# Altium PCB RX.PcbDoc (part 2 of 2)
Units mil, origin at the board's own origin, x right, y up, seen from the top; angles counter-clockwise.
Board outline 2899 x 930 mil, 4 copper layers (Top Layer, Int1 (GND), Int2 (PWR), Bottom Layer), stack 53.912 mil thick; 154 components, 91 nets, 472 pads, 94 vias.
Unrouted connection lines stored in the file: 29.
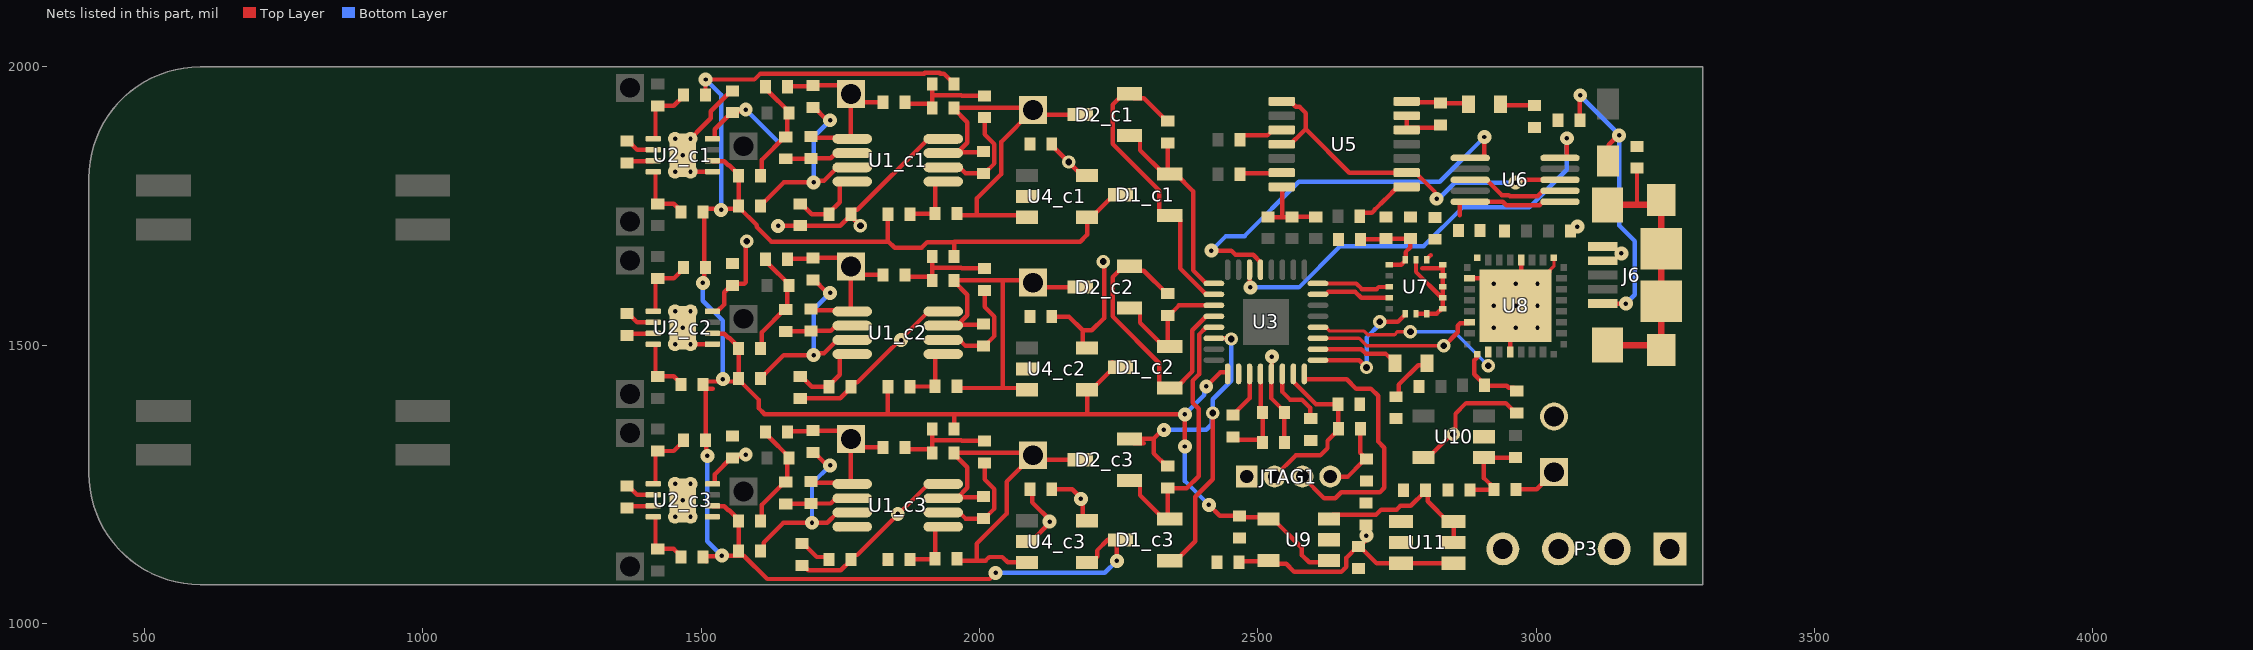
[diagram p4: the nets of this part, all layers, seen from the top]

## Via types
v1: diameter 25, hole 8, Top Layer to Bottom Layer, 69 vias
v2: diameter 24, hole 12, Top Layer to Bottom Layer, 15 vias
v3: diameter 25, hole 8, Top Layer to Bottom Layer, tented top, 9 vias
v4: diameter 25, hole 8, Top Layer to Int1 (GND), 1 vias

## Nets (pads, with @x,y where several pads share a name; then routed paths per layer and width w, separated by ;. In a path a pad name is that pad's centre, name@x,y a point inside that pad or via, vN(x,y) a via of type N, cw(c..) or ccw(c..) an arc to the next point about the centre after c; other vN are vias at no path point) (continued)
GND: C1.2 C2.2 C3.1 C4.1 C5.2 C8.1 C9.1 C10.2 C11.2 C12.2 C13.1 C14.2 C15.1 C16_c1.2 C16_c2.2 C16_c3.2 C17.1 C18.2 C19.2 C20.2 C21.2 Cp1.1 Cp2.1 Cp3.1 Crg.2 CU1-1_c1.1 CU1-1_c2.1 CU1-1_c3.1 CU1_c1.1 CU1_c2.1 CU1_c3.1 CU2_c1.1 CU2_c2.1 CU2_c3.1 CU3-1.1 CU3.1 J6.4 J6.5 JTAG1.1 P3.4 P4.2 R3.1 Rled1.1 Rled2.2 Ros.1 U1_c1.4 U1_c2.4 U1_c3.4 U2_c1.5 U2_c1.9 U2_c2.5 U2_c2.9 U2_c3.5 U2_c3.9 U3.10 U3.12 U4_c1.2 U4_c2.2 U4_c3.2 U5.7 U5.12 U5.13 U6.3 U6.7 U7.7 U7.8 U7.9 U7.10 U7.11 U7.12 U7.13 U7.15 U8.4 U8.17 U8.20 U8.24 U8.26 U8.33 U9.2 U10.2 U11.1 U11.2 | length 2149.9
  Top Layer w6: U8.33@3022.82,1632.42 3031.8,1641.4 U8.17@3031.8,1657.29
  Top Layer w8: v1(1467,1221.32) U2_c3.9@1467,1237.06 ; U2_c2.9@1467,1547.06 v1(1467,1531.32) 1467,1521.41 1486.62,1501.79 U2_c2.5@1520.15,1501.79 ; U2_c1.5@1520.15,1811.79 1486.62,1811.79 1467,1831.41 v1(1467,1841.32) 1467,1857.06 1517.41,1907.47 1517.41,1920.37 1554.03,1957 CU2_c1.1@1556,1957 ; CU2_c3.1@1554.03,1337 CU2_c3.1@1556,1337 ; CU2_c2.1@1554.03,1647 CU2_c2.1@1556,1647 ; CU1_c2.1@1678,1444 1679.97,1444 1698.65,1425.32 CU1-1_c2.1@1729.32,1425.32 1729.32,1427.28 1748.73,1446.7 1748.73,1479.44 1753.22,1483.93 U1_c2.4@1771.31,1483.93 ; CU1_c1.1@1678,1754 1679.97,1754 1698.65,1735.32 CU1-1_c1.1@1729.32,1735.32 1729.32,1737.28 1748.73,1756.7 1748.73,1789.44 1753.22,1793.93 U1_c1.4@1771.31,1793.93 ; CU1_c3.1@1681,1144 1682.97,1144 1707.47,1119.5 1725.13,1119.5 CU1-1_c3.1@1729.32,1115.32 ; U1_c3.4@1748.73,1169.44 1753.22,1173.93 U1_c3.4@1771.31,1173.93 ; U4_c3.2@2084.87,1147.32 2092.74,1147.32 v1@2127.21,1181.79 ; U4_c2.2@2084.87,1457.32 U4_c2.2@2092.74,1457.32 ; U4_c1.2@2084.87,1767.32 U4_c1.2@2092.74,1767.32 ; C16_c3.2@2090.31,1241.32 2094.89,1236.74 2094.89,1217.5 v1@2127.7,1184.7 ; C16_c2.2@2090.31,1551.32 C16_c2.2@2094.89,1546.74 ; C16_c1.2@2090.31,1861.32 C16_c1.2@2094.89,1856.74 ; Ros.1@2455,1335.32 2460.16,1330.16 2503.16,1330.16 CU3-1.1@2508.32,1325 CU3.1@2508.32,1379 2505.01,1382.31 2505.01,1448.09 U3.12@2504.65,1448.44 ; Cp1.1@2518,1730.68 2519.11,1729.57 2559.89,1729.57 Cp2.1@2561,1730.68 2561.29,1730.98 2561.58,1730.68 Cp3.1@2604,1730.68 ; U5.7@2542.8,1784.38 2544,1783.18 2544,1730.68 ; C8.1@2595,1328.63 C8.1@2596.5,1327.13 ; C19.2@2638.79,1696.78 2644.63,1690.94 C19.2@2644.63,1690 ; C9.1@2681.84,1392.84 C9.1@2683,1394 ; C18.2@2728.03,1730.69 C18.2@2730,1730.69 ; U5.13@2767.2,1912.34 U5.12@2767.2,1886.75 2771.08,1890.62 2823.31,1890.62 C21.2@2828,1895.31 ; U7.7@2784,1556.77 U7.8@2803.68,1556.77 2821.4,1556.77 2830.26,1565.63 U7.9@2832.23,1565.63 U7.10@2832.23,1585.32 ; U7.15@2784,1653.23 2784,1631.57 2830.26,1585.32 U7.10@2832.23,1585.32 ; 2795.45,1638.34 2832.23,1638.34 ; Crg.2@2816.14,1729.69 Crg.2@2818.11,1729.69 Crg.2@2820.07,1729.69 ; U7.13@2832.23,1644.37 2832.23,1638.34 ; U8.26@2880.22,1619.88 U8.33@2913.69,1619.88 ; U6.3@2881.29,1797 2910.82,1797 2938.19,1769.63 2950.72,1769.63 2952.85,1767.5 3002.33,1767.5 3012.15,1777.32 U6.7@3042.71,1777.32 ; v3(2923.53,1610.04) v3(2962.9,1570.67) ; U8.4@2953.06,1488 2953.06,1560.83 v3(2962.9,1570.67) ; U8.20@2972.74,1653.35 U8.33@2972.74,1580.51 ; U8.33@3023.73,1631.51 U8.33@2972.74,1580.51 ; C4.1@3061.37,1705 3069.37,1713 v1(3074,1713) ; J6.5@3119.14,1677.2 3137.84,1677.2 3150.04,1665 v4(3153,1665) ; U7.10@2832.23,1585.32 U7.11@2832.23,1605 U7.12@2832.23,1624.69 2832.23,1638.34 ; v3(2962.9,1570.67) U8.33@2972.74,1580.51
  other v1: 2126,1183 1453.22,1191.79 1480.78,1191.79 1453.22,1250.84 1480.78,1250.84 1453.22,1501.79 1480.78,1501.79 1453.22,1560.84 1480.78,1560.84 1453.22,1811.79 1480.78,1811.79 1453.22,1870.84 1480.78,1870.84
  other v3: 2923.53,1531.3 2962.9,1531.3 3002.27,1531.3 2923.53,1570.67 3002.27,1570.67 2962.9,1610.04 3002.27,1610.04
IMU_INT: U3.17 U7.6 | length 237
  Top Layer w8: U3.17@2608,1473.05 2682.09,1473.05 v2(2695.14,1460) ; v2(2719,1542) 2751.51,1542 2764.31,1554.8 U7.6@2764.31,1556.77
  Bottom Layer w8: v2(2695.14,1460) 2695.14,1513.81 2719,1537.67 v2(2719,1542)
MISO: U3.23 U7.4 | length 133.9
  Top Layer w8: U3.23@2608,1591.16 2622.28,1591.16 2626.76,1595.64 2675.12,1595.64 2685.44,1585.32 U7.4@2735.77,1585.32
MOSI: U3.24 U7.3 | length 133.7
  Top Layer w8: U3.24@2608,1610.84 2676.89,1610.84 2686.91,1600.82 2713.15,1600.82 2716.88,1604.56 2735.33,1604.56 U7.3@2735.77,1605
NetC1A_c1_1: C1A_c1.1 C2A_c1.1 R1A_c1.2 R2A_c1.2 | length 199.7
  Top Layer w8: R2A_c1.2@1606.69,1804.32 1609.03,1806.66 1609.03,1833.31 1650.03,1874.32 C2A_c1.1@1652,1874.32 1654.84,1877.16 1654.84,1914.47 R1A_c1.2@1657.69,1917.32 1657.69,1919.28 1621.47,1955.5 1621.47,1958.47 C1A_c1.1@1615.63,1964.32
NetC1A_c2_1: C1A_c2.1 C2A_c2.1 R1A_c2.2 R2A_c2.2 | length 199.7
  Top Layer w8: R2A_c2.2@1606.69,1494.32 1609.03,1496.66 1609.03,1523.31 1650.03,1564.32 C2A_c2.1@1652,1564.32 1654.84,1567.16 1654.84,1604.47 R1A_c2.2@1657.69,1607.32 1657.69,1609.28 1621.47,1645.5 1621.47,1648.47 C1A_c2.1@1615.63,1654.32
NetC1A_c3_1: C1A_c3.1 C2A_c3.1 R1A_c3.2 R2A_c3.2 | length 199.7
  Top Layer w8: R2A_c3.2@1606.69,1184.32 1609.03,1186.66 1609.03,1213.31 1650.03,1254.32 C2A_c3.1@1652,1254.32 1654.84,1257.16 1654.84,1294.47 R1A_c3.2@1657.69,1297.32 1657.69,1299.28 1621.47,1335.5 1621.47,1338.47 C1A_c3.1@1615.63,1344.32
NetC1b_c1_1: C1b_c1.1 C2b_c1.1 R1B_c1.2 R2B_c1.2 | length 188.5
  Top Layer w8: R1B_c1.2@1866,1936.32 1869,1933.32 1910.63,1933.32 C1b_c1.1@1913.63,1930.32 ; C1b_c1.1@1915.01,1926.32 1915.01,1947.32 ; R2B_c1.2@1915.01,1969.32 1915.01,1947.32 ; C2b_c1.1@2009,1948 1968.32,1948 1967,1949.32 1917.01,1949.32 1915.01,1947.32
NetC1b_c2_1: C1b_c2.1 C2b_c2.1 R1B_c2.2 R2B_c2.2 | length 188.5
  Top Layer w8: R1B_c2.2@1866,1626.32 1869,1623.32 1910.63,1623.32 C1b_c2.1@1913.63,1620.32 ; C1b_c2.1@1915.01,1616.32 1915.01,1637.32 ; R2B_c2.2@1915.01,1659.32 1915.01,1637.32 ; C2b_c2.1@2009,1638 1968.32,1638 1967,1639.32 1917.01,1639.32 1915.01,1637.32
NetC1b_c3_1: C1b_c3.1 C2b_c3.1 R1B_c3.2 R2B_c3.2 | length 188.5
  Top Layer w8: R1B_c3.2@1866,1316.32 1869,1313.32 1910.63,1313.32 C1b_c3.1@1913.63,1310.32 ; C1b_c3.1@1915.01,1306.32 1915.01,1327.32 ; R2B_c3.2@1915.01,1349.32 1915.01,1327.32 ; C2b_c3.1@2009,1328 1968.32,1328 1967,1329.32 1917.01,1329.32 1915.01,1327.32
NetC2A_c1_2: C2A_c1.2 R5A_c1.2 U1_c1.2 | length 123.5
  Top Layer w8: C2A_c1.2@1652,1834.94 1652.34,1835.29 1696.66,1835.29 R5A_c1.2@1697,1835.63 1732.62,1835.63 1742.1,1845.11 U1_c1.2@1771.31,1845.11
NetC2A_c2_2: C2A_c2.2 R5A_c2.2 U1_c2.2 | length 123.5
  Top Layer w8: C2A_c2.2@1652,1524.94 1652.34,1525.29 1696.66,1525.29 R5A_c2.2@1697,1525.63 1732.62,1525.63 1742.1,1535.11 U1_c2.2@1771.31,1535.11
NetC2A_c3_2: C2A_c3.2 R5A_c3.2 U1_c3.2 | length 123.5
  Top Layer w8: C2A_c3.2@1652,1214.94 1652.34,1215.29 1696.66,1215.29 R5A_c3.2@1697,1215.63 1732.62,1215.63 1742.1,1225.11 U1_c3.2@1771.31,1225.11
NetC2b_c1_2: C2b_c1.2 R5b_c1.2 U1_c1.6 | length 193.6
  Top Layer w8: U1_c1.6@1934.69,1819.52 1963.9,1819.52 1974.79,1808.63 R5b_c1.2@2007,1808.63 2008.97,1808.63 2026.81,1826.47 2026.81,1861.16 2009,1878.97 C2b_c1.2@2009,1908.63
NetC2b_c2_2: C2b_c2.2 R5b_c2.2 U1_c2.6 | length 193.6
  Top Layer w8: U1_c2.6@1934.69,1509.52 1963.9,1509.52 1974.79,1498.63 R5b_c2.2@2007,1498.63 2008.97,1498.63 2026.81,1516.47 2026.81,1551.16 2009,1568.97 C2b_c2.2@2009,1598.63
NetC2b_c3_2: C2b_c3.2 R5b_c3.2 U1_c3.6 | length 193.6
  Top Layer w8: U1_c3.6@1934.69,1199.52 1963.9,1199.52 1974.79,1188.63 R5b_c3.2@2007,1188.63 2008.97,1188.63 2026.81,1206.47 2026.81,1241.16 2009,1258.97 C2b_c3.2@2009,1288.63
NetC5_1: C5.1 FB1.2 J6.1 | length 565.5
  Top Layer w8: C5.1@3078.37,1904.06 v1@3078.37,1950.69 ; J6.1@3119.14,1574.83 v1(3161,1574.83) ; FB1.2@3129,1830.82 3130,1831.82 3130,1860 3147,1877 v1(3149,1877)
  Bottom Layer w8: v1(3079,1949) 3079,1948 3149,1878 v1(3149,1877) 3149,1715 3177,1687 3177,1590.83 v1(3161,1574.83)
NetC6_c1_2: C6_c1.2 R1_c1.1 U2_c1.1 | length 119.8
  Top Layer w8: U2_c1.1@1413.85,1870.84 1417,1870.84 1417.93,1871.76 1417.93,1925.87 C6_c1.2@1422,1929.94 1450.91,1929.94 1468.32,1947.35 R1_c1.1@1468.32,1949.32
NetC6_c2_2: C6_c2.2 R1_c2.1 U2_c2.1 | length 119.8
  Top Layer w8: U2_c2.1@1413.85,1560.84 1417,1560.84 1417.93,1561.76 1417.93,1615.87 C6_c2.2@1422,1619.94 1450.91,1619.94 1468.32,1637.35 R1_c2.1@1468.32,1639.32
NetC6_c3_2: C6_c3.2 R1_c3.1 U2_c3.1 | length 119.8
  Top Layer w8: U2_c3.1@1413.85,1250.84 1417,1250.84 1417.93,1251.76 1417.93,1305.87 C6_c3.2@1422,1309.94 1450.91,1309.94 1468.32,1327.35 R1_c3.1@1468.32,1329.32
NetC7_c1_2: C7_c1.2 R2_c1.2 U2_c1.4 | length 111.9
  Top Layer w8: U2_c1.4@1413.85,1811.79 1417,1811.79 1417.93,1810.87 1417.93,1758.07 C7_c1.2@1422,1754 1450.91,1754 1463.63,1741.28 R2_c1.2@1463.63,1739.32
NetC7_c2_2: C7_c2.2 R2_c2.2 U2_c2.4 | length 111.9
  Top Layer w8: U2_c2.4@1413.85,1501.79 1417,1501.79 1417.93,1500.87 1417.93,1448.07 C7_c2.2@1422,1444 1450.91,1444 1463.63,1431.28 R2_c2.2@1463.63,1429.32
NetC7_c3_2: C7_c3.2 R2_c3.2 U2_c3.4 | length 111.9
  Top Layer w8: U2_c3.4@1413.85,1191.79 1417,1191.79 1417.93,1190.87 1417.93,1138.07 C7_c3.2@1422,1134 1450.91,1134 1463.63,1121.28 R2_c3.2@1463.63,1119.32
NetC8_2: C8.2 U3.14 | length 114.6
  Top Layer w8: U3.14@2544.38,1448.09 U3.14@2544.02,1448.44 2544.02,1415.98 2557.65,1402.35 2579,1402.35 2594,1387.35 2594,1369 C8.2@2595,1368
NetC11_1: C11.1 Rbt1.1 Rbt2.1 U10.1 | length 165.6
  Top Layer w8: C11.1@2880.68,1240 2881.18,1240.5 2923.82,1240.5 Rbt2.1@2924.32,1241 2924.32,1242.97 2906,1261.28 U10.1@2906,1298 Rbt1.1@2963,1298
NetCrg_1: Crg.1 U7.14 | length 11.5
  Top Layer w8: U7.14@2803.68,1653.23 2803.68,1655.2 2810.45,1661.96
NetDS1_2: DS1.2 Rled1.2 | length 62.4
  Top Layer w8: DS1.2@2935.54,1933 2937.86,1930.69 Rled1.2@2997,1930.69
NetDS2_1: DS2.1 U3.18 | length 148.8
  Top Layer w8: U3.18@2608,1492.73 2685.85,1492.73 2693.59,1485 2729.25,1485 DS2.1@2746.46,1467.79
NetDS2_2: DS2.2 Rled2.1 | length 90.2
  Top Layer w8: Rled2.1@2748.28,1407.37 2753.21,1412.31 2753.21,1429.21 2788,1464 2799.75,1464 DS2.2@2803.54,1467.79
NetJ6_6: J6.6 J6.7 J6.8 J6.9 J6.10 J6.11 R3.2 | length 535.9
  Top Layer w8: 3181,1752 R3.2@3181,1817.94 ; J6.8@3215.6,1500.03 J6.8@3224.46,1491.17 ; J6.9@3215.6,1752 J6.9@3224.46,1760.86
  Top Layer w12: J6.6@3128,1500.03 J6.8@3215.6,1500.03 ; J6.7@3128,1752 3181,1752 J6.9@3215.6,1752 ; J6.8@3224.46,1491.17 J6.10@3224.46,1578.77 J6.11@3224.46,1673.26 J6.9@3224.46,1760.86
NetR3A_c1_1: R3A_c1.1 R4A_c1.2 U1_c1.3 | length 358.9
  Top Layer w8: R3A_c1.1@1606.37,1750.32 1606.37,1752.28 1612.21,1758.13 1614.18,1758.13 1648.37,1792.32 v1(1702,1792.32) 1705.06,1795.38 1720.59,1795.38 1744.73,1819.52 U1_c1.3@1771.31,1819.52 ; R4A_c1.2@1701,1927.32 1702.97,1927.32 1722.97,1907.31 1728.31,1907.31 v1(1731.56,1904.06)
  Bottom Layer w8: v1(1702,1792.32) 1702,1874.5 v1(1731.56,1904.06)
NetR3A_c2_1: R3A_c2.1 R4A_c2.2 U1_c2.3 | length 358.9
  Top Layer w8: R3A_c2.1@1606.37,1440.32 1606.37,1442.28 1612.21,1448.13 1614.18,1448.13 1648.37,1482.32 v1(1702,1482.32) 1705.06,1485.38 1720.59,1485.38 1744.73,1509.52 U1_c2.3@1771.31,1509.52 ; R4A_c2.2@1701,1617.32 1702.97,1617.32 1722.97,1597.31 1728.31,1597.31 v1(1731.56,1594.06)
  Bottom Layer w8: v1(1702,1482.32) 1702,1564.5 v1(1731.56,1594.06)
NetR3A_c3_1: R3A_c3.1 R4A_c3.2 U1_c3.3 | length 355.8
  Top Layer w8: R3A_c3.1@1606.37,1130.32 1612.21,1136.16 1612.21,1145.52 1647.69,1181 1726.21,1181 1744.73,1199.52 U1_c3.3@1771.31,1199.52 ; R4A_c3.2@1701,1307.32 1702.97,1307.32 1722.97,1287.31 1728.31,1287.31 v1(1731.56,1284.06)
  Bottom Layer w8: v1(1699,1181) 1699,1251.5 v1(1731.56,1284.06)
NetR3B_c1_2: R3B_c1.2 R4B_c1.1 U1_c1.5 | length 115.4
  Top Layer w8: R3B_c1.2@1874.69,1735.32 1875.19,1735.82 1919.82,1735.82 R4B_c1.1@1920.32,1736.32 1920.32,1789.44 1924.8,1793.93 U1_c1.5@1934.69,1793.93
NetR3B_c2_2: R3B_c2.2 R4B_c2.1 U1_c2.5 | length 115.4
  Top Layer w8: R3B_c2.2@1874.69,1425.32 1875.19,1425.82 1919.82,1425.82 R4B_c2.1@1920.32,1426.32 1920.32,1479.44 1924.8,1483.93 U1_c2.5@1934.69,1483.93
NetR3B_c3_2: R3B_c3.2 R4B_c3.1 U1_c3.5 | length 115.4
  Top Layer w8: R3B_c3.2@1874.69,1115.32 1875.19,1115.82 1919.82,1115.82 R4B_c3.1@1920.32,1116.32 1920.32,1169.44 1924.8,1173.93 U1_c3.5@1934.69,1173.93
NetRg1_c1_1: Rg1_c1.1 U2_c1.2 | length 53.4
  Top Layer w8: Rg1_c1.1@1367,1867 1368.97,1867 1384.81,1851.16 U2_c1.2@1413.85,1851.16
NetRg1_c1_2: Rg1_c1.2 U2_c1.3 | length 48.4
  Top Layer w8: Rg1_c1.2@1367,1827.63 1369.92,1830.55 1412.93,1830.55 U2_c1.3@1413.85,1831.47
NetRg1_c2_1: Rg1_c2.1 U2_c2.2 | length 53.4
  Top Layer w8: Rg1_c2.1@1367,1557 1368.97,1557 1384.81,1541.16 U2_c2.2@1413.85,1541.16
NetRg1_c2_2: Rg1_c2.2 U2_c2.3 | length 48.4
  Top Layer w8: Rg1_c2.2@1367,1517.63 1369.92,1520.55 1412.93,1520.55 U2_c2.3@1413.85,1521.47
NetRg1_c3_1: Rg1_c3.1 U2_c3.2 | length 53.4
  Top Layer w8: Rg1_c3.1@1367,1247 1368.97,1247 1384.81,1231.16 U2_c3.2@1413.85,1231.16
NetRg1_c3_2: Rg1_c3.2 U2_c3.3 | length 48.4
  Top Layer w8: Rg1_c3.2@1367,1207.63 1369.92,1210.55 1412.93,1210.55 U2_c3.3@1413.85,1211.47
NetRio1_1: Rio1.1 Rio2.1 U8.1 | length 128.4
  Top Layer w8: U8.1@2894,1484.06 2894,1477.96 2888.6,1472.57 2888.6,1448.05 2906.68,1429.97 Rio2.1@2906.68,1428 2907.68,1427 2947,1427 2950.47,1423.53 2959.16,1423.53 Rio1.1@2965,1417.68
NetRos_2: Ros.2 U3.11 | length 86.2
  Top Layer w8: Ros.2@2455,1374.69 2484.97,1404.66 U3.11@2484.97,1448.44
NetRp1_1: Rp1.1 U5.3 | length 83.6
  Top Layer w8: Rp1.1@2467.68,1869 2467.68,1870.97 2473.53,1876.81 2517.11,1876.81 2527.05,1886.75 U5.3@2542.8,1886.75
NetRp2_1: Rp2.1 U5.6 | length 76.3
  Top Layer w8: Rp2.1@2467.68,1807 2469.17,1808.49 2541.31,1808.49 U5.6@2542.8,1809.98
NetRp3_1: Rp3.1 U5.8 | length 106.7
  Top Layer w8: Rp3.1@2683,1731.63 2683,1731.93 2688.84,1737.77 2704.84,1737.77 2710.19,1743.12 2710.19,1743.84 2728.52,1762.18 2729.25,1762.18 2751.46,1784.38 U5.8@2767.2,1784.38
NetU3_29: U3.29 U6.1 | length 745.5
  Top Layer w8: v1(2416.5,1669.95) 2452.27,1669.95 2459.79,1662.42 2491.46,1662.42 2504.65,1649.23 U3.29@2504.65,1635.45 ; U6.1@2881.29,1836.37 2901.24,1836.37 2907,1842.13 v1(2907,1874)
  Bottom Layer w8: v1(2416.5,1669.95) 2442.55,1696 2476,1696 2573.5,1793.5 2826.5,1793.5 v1(2907,1874)
NetU3_30: U3.30 U6.10 | length 805.4
  Top Layer w8: U3.30@2484.97,1649.23 U3.30@2484.97,1635.45 2485.32,1635.1 2485.32,1605.05 v1(2486.59,1603.78) ; U6.10@3042.71,1836.37 3053.24,1836.37 3055,1838.13 v1(3055,1871.75)
  Bottom Layer w8: v1(2486.59,1603.78) 2573.78,1603.78 2648,1678 2798,1678 2867.5,1747.5 2987.5,1747.5 3055,1815 v1(3055,1871.75)
ref_dig: U5.1 U5.4 U5.9 U6.8 | length 678.9
  Top Layer w8: U5.4@2542.8,1861.16 2558.54,1861.16 2568.26,1870.87 2568.58,1870.87 2586,1888.29 ; U5.1@2542.8,1937.93 2558.54,1937.93 2568.26,1928.21 2574.79,1928.21 2586,1917 2586,1888.29 ; U5.9@2767.2,1809.98 U5.9@2782.95,1809.98 ; v1(2821,1763) 2818.11,1765.89 2818.11,1775.14 2792.99,1800.26 2792.67,1800.26 U5.9@2782.95,1809.98 ; v1(2963,1792) 2967.6,1792 2972.6,1797 U6.8@3042.71,1797 ; 2586,1888.29 2664.32,1809.98 U5.9@2782.95,1809.98
  Bottom Layer w8: v1(2821,1763) 2824.68,1763 2853.68,1792 v1(2963,1792)
RST: C9.2 JTAG1.2 R5.1 U3.15 | length 314.5
  Top Layer w8: JTAG1.2@2530,1264 2568,1302 2612,1302 2625,1315 2625,1328.4 2644.63,1348.03 R5.1@2644.63,1350 2644.13,1350 2644.13,1393.5 C9.2@2643.63,1394 2604.37,1394 2563.71,1434.66 U3.15@2563.71,1448.44
RX: P3.2 U3.19 U8.30 | length 300.6
  Top Layer w6: U3.19@2608,1512.42 2681.72,1512.42 2695.14,1499 v2(2834,1499)
  Top Layer w8: v2@2835.56,1499.56 2859,1523 2859,1535.17 2863.07,1539.24 2878.32,1539.24 U8.30@2880.22,1541.14
SIGN_c1: Cfilt1_c1.2 D1_c1.1 D2_c1.2 U3.2 | length 564.5
  Top Layer w8: Cfilt1_c1.2@2338,1902.69 2336.03,1902.69 2294.81,1943.91 2277.39,1943.91 D2_c1.2@2269.58,1951.72 2258.76,1951.72 2238.94,1931.91 2238.94,1861.79 2322.94,1777.79 2322.94,1740.72 2330.76,1732.91 D1_c1.1@2341.58,1732.91 2352.41,1732.91 2360.22,1725.1 2360.22,1638.15 2407.21,1591.16 U3.2@2420.99,1591.16
SIGN_c2: Cfilt1_c2.2 D1_c2.1 D2_c2.2 U3.4 | length 551.6
  Top Layer w8: Cfilt1_c2.2@2338,1592.69 2336.03,1592.69 2294.81,1633.91 2277.39,1633.91 D2_c2.2@2269.58,1641.72 2258.76,1641.72 2238.94,1621.91 2238.94,1551.79 2322.94,1467.79 2322.94,1430.72 2330.76,1422.91 D1_c2.1@2341.58,1422.91 2352.41,1422.91 2382.29,1452.8 2382.29,1526.87 2407.21,1551.79 U3.4@2420.99,1551.79
SIGN_c3: Cfilt1_c3.2 D1_c3.1 D2_c3.2 U3.6 | length 772.1
  Top Layer w8: 2294.81,1323.91 2277.39,1323.91 D2_c3.2@2269.58,1331.72 2312.64,1331.72 ; D1_c3.1@2322.94,1120.72 2330.76,1112.91 2352.41,1112.91 2387.5,1148 2387.5,1227.82 2419,1259.32 v2(2419,1378.19) ; v1(2331,1348) 2328.92,1348 2312.64,1331.72 ; Cfilt1_c3.2@2338,1282.69 2336.03,1282.69 2312.64,1306.08 2312.64,1331.72 ; U3.6@2420.99,1512.42 2421.34,1512.07 2450.93,1512.07 v2(2452,1511)
  Bottom Layer w8: v1(2331,1348) 2407,1348 2417,1358 2417,1376.19 v2(2419,1378.19) 2419,1403.09 2452,1436.09 v2(2452,1511)
SIGP_c1: Cfilt1_c1.1 D1_c1.2 D2_c1.1 U3.1 | length 413
  Top Layer w8: D2_c1.1@2269.58,1876.91 2280.41,1876.91 2288.22,1869.1 2288.22,1850.25 2330.76,1807.72 2338,1807.72 D1_c1.2@2341.58,1807.72 ; Cfilt1_c1.1@2338,1863.32 2338,1811.3 D1_c1.2@2341.58,1807.72 ; U3.1@2420.99,1610.84 2407.21,1610.84 2383.54,1634.52 2383.54,1776.59 2352.41,1807.72 D1_c1.2@2341.58,1807.72
SIGP_c2: Cfilt1_c2.1 D1_c2.2 D2_c2.1 U3.3 | length 259.3
  Top Layer w8: D2_c2.1@2269.58,1566.91 2280.41,1566.91 2288.22,1559.1 2288.22,1540.25 2330.76,1497.72 2338,1497.72 D1_c2.2@2341.58,1497.72 2338,1501.3 Cfilt1_c2.1@2338,1553.32 2339.97,1553.32 2358.13,1571.47 U3.3@2420.99,1571.47
SIGP_c3: Cfilt1_c3.1 D1_c3.2 D2_c3.1 U3.5 | length 528.9
  Top Layer w8: D2_c3.1@2269.58,1256.91 2280.41,1256.91 2288.22,1249.1 2288.22,1230.25 2330.76,1187.72 2338,1187.72 D1_c3.2@2341.58,1187.72 2338,1191.3 Cfilt1_c3.1@2338,1243.32 2372.03,1243.32 2393.5,1264.79 2393.5,1385.96 2382.71,1396.75 2382.71,1436.25 2394.29,1447.82 2394.29,1519.18 2407.21,1532.1 U3.5@2420.99,1532.1
TEST: JTAG1.3 U3.16 | length 494.8
  Top Layer w8: JTAG1.3@2580,1264 2618.89,1225.11 2639.11,1225.11 2650,1236 2719.26,1236 2727,1243.74 2727,1316 2716,1327 2716,1409 2703,1422 2676.28,1422 2659.62,1438.66 2584.24,1438.66 2583.39,1439.51 U3.16@2583.39,1448.44
TX: P3.3 U3.20 U8.2 | length 338.5
  Top Layer w6: U3.20@2622.28,1532.1 2628.97,1525.41 2690.73,1525.41 2697.18,1518.95 2745.5,1518.95 2750.55,1524 v2(2774,1524)
  Top Layer w8: U3.20@2608,1532.1 U3.20@2622.28,1532.1
  Bottom Layer w6: v2(2774,1524) 2852.7,1524 v2(2913.69,1463.02)
V1.2: C2.1 D1_c1.3 D1_c2.3 D1_c3.3 R1_c1.2 R1_c2.2 R1_c3.2 R2_c1.1 R2_c2.1 R2_c3.1 R2A_c1.1 R2A_c2.1 R2A_c3.1 R2B_c1.1 R2B_c2.1 R2B_c3.1 R3A_c1.2 R3A_c2.2 R3A_c3.2 R3B_c1.1 R3B_c2.1 R3B_c3.1 U2_c1.6 U2_c2.6 U2_c3.6 U3.9 U4_c1.4 U4_c2.4 U4_c3.4 U9.1 U9.4 | length 5276.2
  Top Layer w8: v1(1503,1612) 1505.34,1614.34 1505.34,1636.97 R1_c2.2@1507.69,1639.32 1505.34,1641.66 R2_c1.1@1505.34,1731.5 ; R2_c1.1@1505.34,1735 1503,1737.35 R2_c1.1@1503,1739.32 1508.5,1744.82 v1@1535.66,1744.82 ; R1_c1.2@1507.69,1949.32 1507.69,1977 v1(1508,1977.32) 1595.66,1977.32 1606.35,1988 1900.73,1988 1901.85,1989.13 1928.16,1989.13 1929.29,1988 1935.69,1988 R2B_c1.1@1954.38,1969.32 ; R2_c3.1@1508.84,1111.5 1503,1117.35 R2_c3.1@1503,1119.32 1504.34,1120.66 1535.66,1120.66 v1(1537,1122) 1576.64,1122 1618.64,1080 2018,1080 v1(2029,1091) ; v1(1511,1301) 1509.34,1302.66 1509.34,1327.66 R1_c3.2@1507.69,1329.32 1508,1329.63 R2_c2.1@1508,1422.35 ; U2_c3.6@1520.15,1211.47 1521.07,1210.55 1541.4,1210.55 1548.51,1203.44 1550.16,1203.44 1567.32,1186.28 R2A_c3.1@1567.32,1184.32 1567.16,1184.16 1567.16,1130.47 R3A_c3.2@1567,1130.32 R3A_c3.2@1561.94,1125.25 ; U2_c2.6@1520.15,1521.47 1521.07,1520.55 1541.4,1520.55 1548.51,1513.44 1550.16,1513.44 1567.32,1496.28 R2A_c2.1@1567.32,1494.32 1567.16,1494.16 1567.16,1440.47 R3A_c2.2@1567,1440.32 ; U2_c1.6@1520.15,1831.47 1521.07,1830.55 1541.4,1830.55 1548.51,1823.44 1550.16,1823.44 1567.32,1806.28 R2A_c1.1@1567.32,1804.32 1567.16,1804.16 1567.16,1750.47 R3A_c1.2@1567,1750.32 ; 1520.5,1421.5 1508.84,1421.5 R2_c2.1@1508,1422.35 ; v1(1535.66,1743) v1@1535.66,1744.82 ; v1(1539,1439) v1@1539,1434.82 ; R3B_c3.1@1829.47,1108.38 1835.32,1114.22 R3B_c3.1@1835.32,1115.32 ; 1834,1685.82 1626.19,1685.82 1599.52,1712.49 1599.52,1715.83 1567,1748.35 R3A_c1.2@1567,1750.32 ; 1835.32,1377.13 R3B_c2.1@1835.32,1425.32 ; R3B_c1.1@1835.32,1735.32 1835.32,1687.13 1847.44,1675 1895.82,1675 1906.01,1685.19 1954.38,1685.19 R2B_c2.1@1954.38,1659.32 ; R2B_c3.1@1954.38,1349.32 1954.38,1375.19 ; 1955,1685.82 2180.82,1685.82 2193.13,1698.13 U4_c1.4@2193.13,1729.91 2201.01,1729.91 2241.41,1770.32 D1_c1.3@2253,1770.32 ; U4_c3.4@2193.13,1109.91 2201.01,1109.91 2211.11,1120.01 2211.11,1131.11 2230.32,1150.32 D1_c3.3@2242.17,1150.32 ; D1_c2.3@2238,1469.13 2244.11,1463.02 D1_c2.3@2246.81,1460.32 ; v1(2246.81,1112.67) 2246.81,1144.13 D1_c3.3@2253,1150.32 D1_c3.3@2242.17,1150.32 ; D1_c3.3@2250,1158.14 D1_c3.3@2242.17,1150.32 ; D1_c2.3@2253,1460.32 D1_c2.3@2246.81,1460.32 ; v1(2369,1318) v1(2369,1375.82) 2222,1375.82 2193,1375.81 ; v1(2407.21,1425.95) 2432.36,1451.1 2445.6,1451.1 U3.9@2445.6,1448.44 ; v1(2412,1213) 2431.63,1193.37 C2.1@2467,1193.37 2469.73,1190.64 2516.38,1190.64 U9.4@2519.11,1187.92 2526.98,1187.92 2579,1135.9 2579,1123 2592,1110 2624.26,1110 U9.1@2627.38,1113.11 ; R2_c2.1@1503,1429.32 1508,1424.32 R2_c2.1@1508,1422.35 ; R2_c2.1@1503,1429.32 1508.5,1434.82 v1@1539,1434.82 ; R2_c2.1@1503,1429.32 1503,1427.35 R2_c2.1@1508,1422.35 ; v1@1535.66,1744.82 1561.5,1744.82 R3A_c1.2@1567,1750.32 ; v1@1539,1434.82 1561.5,1434.82 R3A_c2.2@1567,1440.32 ; R3A_c2.2@1567,1440.32 1567,1438.35 1603,1402.35 1603,1387 1613.19,1376.81 1613.19,1375.81 1835.32,1375.81 1954.38,1375.81 2193,1375.81 ; 2193,1375.81 2193.13,1375.95 U4_c2.4@2193.13,1419.91 2201.01,1419.91 2241.41,1460.32 D1_c2.3@2246.81,1460.32
  Bottom Layer w8: v1(1503,1612) 1503,1579.81 1539,1543.81 v1(1539,1439) ; v1(1508,1977.32) 1535.66,1949.66 v1(1535.66,1743) ; v1(1511,1301) 1511,1148 v1(1537,1122) ; v1(2029,1091) 2225.14,1091 v1(2246.81,1112.67) ; v1(2369,1318) 2369,1256 v1(2412,1213) ; v1(2369,1375.82) 2403.96,1410.77 2403.96,1422.69 v1(2407.21,1425.95)
V_BP_A_c1: C1A_c1.2 J4_c1.1 R1B_c1.1 R4A_c1.1 R5A_c1.1 U1_c1.1 | length 337.6
  Top Layer w8: C1A_c1.2@1655,1964.32 1656.18,1965.5 1699.81,1965.5 R4A_c1.1@1701,1966.69 1753.63,1966.69 J4_c1.1@1769,1951.32 ; R5A_c1.1@1697,1875 1699.44,1872.56 1769.45,1872.56 1769,1873.01 J4_c1.1@1769,1951.32 ; R1B_c1.1@1826.63,1936.32 1784,1936.32 J4_c1.1@1769,1951.32
V_BP_A_c2: C1A_c2.2 J4_c2.1 R1B_c2.1 R4A_c2.1 R5A_c2.1 U1_c2.1 | length 337.6
  Top Layer w8: C1A_c2.2@1655,1654.32 1656.18,1655.5 1699.81,1655.5 R4A_c2.1@1701,1656.69 1753.63,1656.69 J4_c2.1@1769,1641.32 ; R5A_c2.1@1697,1565 1699.44,1562.56 1769.45,1562.56 1769,1563.01 J4_c2.1@1769,1641.32 ; R1B_c2.1@1826.63,1626.32 1784,1626.32 J4_c2.1@1769,1641.32
V_BP_A_c3: C1A_c3.2 J4_c3.1 R1B_c3.1 R4A_c3.1 R5A_c3.1 U1_c3.1 | length 337.6
  Top Layer w8: C1A_c3.2@1655,1344.32 1656.18,1345.5 1699.81,1345.5 R4A_c3.1@1701,1346.69 1753.63,1346.69 J4_c3.1@1769,1331.32 ; R5A_c3.1@1697,1255 1699.44,1252.56 1769.45,1252.56 1769,1253.01 J4_c3.1@1769,1331.32 ; R1B_c3.1@1826.63,1316.32 1784,1316.32 J4_c3.1@1769,1331.32
V_BP_B_c1: C1b_c1.2 D2_c1.3 J5_c1.1 R4B_c1.2 R5b_c1.1 U1_c1.7 U4_c1.3 | length 787.7
  Top Layer w8: R4B_c1.2@1959.69,1736.32 1962.89,1733.11 1993,1733.11 1995,1733.11 ; R5b_c1.1@2007,1848 2005.56,1846.56 U1_c1.7@1960.96,1846.56 ; U4_c1.3@2084.87,1729.91 2081.67,1733.11 1995,1733.11 ; D2_c1.3@2181,1914.32 2104,1914.32 J5_c1.1@2096,1922.32 ; U1_c1.7@1960.96,1846.56 1959.52,1845.11 U1_c1.7@1934.69,1845.11 1936.14,1846.56 U1_c1.7@1960.96,1846.56 ; U1_c1.7@1960.96,1846.56 1978.13,1863.72 1978.13,1900.6 1954.38,1924.35 C1b_c1.2@1954.38,1926.32 1954.54,1926.47 2091.84,1926.47 J5_c1.1@2096,1922.32 ; 1995,1733.11 1995,1763.66 2038.81,1807.47 2038.81,1865.13 J5_c1.1@2096,1922.32
V_BP_B_c2: C1b_c2.2 D2_c2.3 J5_c2.1 R4B_c2.2 R5b_c2.1 U1_c2.7 U4_c2.3 | length 745.8
  Top Layer w8: R4B_c2.2@1959.69,1426.32 1962.89,1423.11 2042,1423.11 ; R5b_c2.1@2007,1538 2005.56,1536.56 U1_c2.7@1960.96,1536.56 ; 2042,1612.32 2042,1423.11 ; U4_c2.3@2084.87,1419.91 2081.67,1423.11 2042,1423.11 ; D2_c2.3@2181,1604.32 2104,1604.32 J5_c2.1@2096,1612.32 2091.84,1616.47 1954.54,1616.47 C1b_c2.2@1954.38,1616.32 1954.38,1614.35 1978.13,1590.6 1978.13,1553.72 U1_c2.7@1960.96,1536.56 ; U1_c2.7@1960.96,1536.56 1936.14,1536.56 U1_c2.7@1934.69,1535.11 1959.52,1535.11 U1_c2.7@1960.96,1536.56
V_BP_B_c3: C1b_c3.2 D2_c3.3 J5_c3.1 R4B_c3.2 R5b_c3.1 U1_c3.7 U4_c3.3 | length 793
  Top Layer w8: R4B_c3.2@1959.69,1116.32 1962.89,1113.11 1995,1113.11 ; R5b_c3.1@2007,1228 2005.56,1226.56 U1_c3.7@1960.96,1226.56 ; U4_c3.3@2084.87,1109.91 2050.39,1109.91 2040.81,1119.5 2017.19,1119.5 2010.81,1113.11 1995,1113.11 ; D2_c3.3@2181,1294.32 2104,1294.32 J5_c3.1@2096,1302.32 ; U1_c3.7@1960.96,1226.56 1936.14,1226.56 U1_c3.7@1934.69,1225.11 1959.52,1225.11 U1_c3.7@1960.96,1226.56 ; U1_c3.7@1960.96,1226.56 1978.13,1243.72 1978.13,1280.6 1954.38,1304.35 C1b_c3.2@1954.38,1306.32 1954.54,1306.47 2091.84,1306.47 J5_c3.1@2096,1302.32 ; 1995,1113.11 1995,1143.66 2048.55,1197.21 2048.55,1254.87 J5_c3.1@2096,1302.32
VBAT: P4.1 Rbt2.2 | length 81.2
  Top Layer w8: Rbt2.2@2963.69,1241 3000.99,1241 P4.1@3032,1272
VCC: C1.1 C10.1 C12.1 C14.1 C15.2 C16_c1.1 C16_c2.1 C16_c3.1 C18.1 C19.1 C20.1 C21.1 CU1-1_c1.2 CU1-1_c2.2 CU1-1_c3.2 CU1_c1.2 CU1_c2.2 CU1_c3.2 CU2_c1.2 CU2_c2.2 CU2_c3.2 CU3-1.2 CU3.2 DS1.1 JTAG1.4 P3.1 R5.2 Rio1.2 U1_c1.8 U1_c2.8 U1_c3.8 U2_c1.8 U2_c2.8 U2_c3.8 U3.13 U4_c1.5 U4_c2.5 U4_c3.5 U5.14 U6.5 U6.6 U7.1 U7.16 U9.5 U10.5 U11.3 U11.4 | length 3440
  Top Layer w8: U2_c3.8@1520.15,1250.84 1523.24,1250.84 1524.17,1251.76 1524.17,1267.76 1554.03,1297.63 CU2_c3.2@1556,1297.63 1558.84,1300.47 1577.16,1300.47 v1(1580,1303.32) v1@1583,1306.32 ; U2_c2.8@1520.15,1560.84 1529.01,1560.84 1541.24,1573.08 1541.24,1594.84 1554.03,1607.63 CU2_c2.2@1556,1607.63 1558.84,1610.47 1577.16,1610.47 1580,1613.32 1580,1685 v2(1582,1687) ; U2_c1.8@1520.15,1870.84 1523.24,1870.84 1524.17,1871.76 1524.17,1887.76 1554.03,1917.63 CU2_c1.2@1556,1917.63 1558.84,1920.47 1577.16,1920.47 v1(1580,1923.32) ; v1(1638,1714.32) 1638.31,1714.63 CU1_c1.2@1678,1714.63 1749.97,1714.63 CU1-1_c1.2@1768.69,1733.35 ; CU1_c2.2@1678,1404.63 1749.97,1404.63 1768.69,1423.35 CU1-1_c2.2@1768.69,1425.32 1768.69,1427.28 1774.53,1433.13 1780.54,1433.13 1908.12,1560.7 U1_c2.8@1934.69,1560.7 ; CU1_c3.2@1679.03,1104.63 CU1_c3.2@1681,1104.63 1682.97,1104.63 1692.09,1095.5 1750.84,1095.5 1768.69,1113.35 CU1-1_c3.2@1768.69,1115.32 1768.69,1117.28 1774.53,1123.13 1780.54,1123.13 1908.12,1250.7 U1_c3.8@1934.69,1250.7 ; v2(1786,1714.32) 1768.69,1731.63 CU1-1_c1.2@1768.69,1733.35 ; U1_c1.8@1934.69,1870.7 1908.12,1870.7 1780.54,1743.13 1774.53,1743.13 1768.69,1737.28 CU1-1_c1.2@1768.69,1735.32 CU1-1_c1.2@1768.69,1733.35 ; C16_c3.1@2129.68,1241.32 2166.68,1241.32 2185.32,1222.68 2185.32,1192.53 U4_c3.5@2193.13,1184.72 2185.26,1184.72 U4_c3.5@2177.45,1176.91 ; C16_c2.1@2129.68,1551.32 2160.68,1551.32 2185.32,1526.68 ; C16_c1.1@2129.68,1861.32 2129.68,1859.35 2176.5,1812.53 2185.32,1812.53 U4_c1.5@2193.13,1804.72 ; U4_c2.5@2193.13,1494.72 2185.32,1502.53 2185.32,1526.68 ; v2(2222,1650.19) 2223.64,1648.55 2223.64,1548.64 2201.68,1526.68 2185.32,1526.68 ; C10.1@2466.24,1110 2467.79,1111.56 2517.55,1111.56 U9.5@2519.11,1113.11 2525.02,1107.2 2550.8,1107.2 2565,1093 2650.07,1093 2655.06,1097.99 2655.06,1098.06 2659,1102 2659,1118.34 2679.03,1138.37 C15.2@2681,1138.37 C15.2@2682.97,1138.37 ; v1(2525,1479.44) 2524.67,1479.11 2524.67,1448.77 U3.13@2524.34,1448.44 2524.34,1404.32 2547.69,1380.97 CU3.2@2547.69,1379 CU3-1.2@2547.69,1325 ; JTAG1.4@2630,1264 2661.69,1264 2674.44,1276.75 2674.44,1277.09 C12.1@2693.03,1295.68 ; R5.2@2684,1350 2684,1306.68 2687.19,1303.5 2687.19,1301.53 C12.1@2693.03,1295.68 ; C19.1@2684,1690 2684.66,1690.66 2729.34,1690.66 C18.1@2730,1691.32 C20.1@2774,1691.32 2773.57,1690.89 2773.57,1675.57 2765.24,1667.24 2765.24,1654.15 U7.16@2764.31,1653.23 2764.31,1651.26 2757.43,1644.37 U7.1@2735.77,1644.37 ; C14.1@2694,1177.32 2694.5,1176.82 2694.5,1158.5 v1(2695,1158) 2695,1150.4 C15.2@2682.97,1138.37 ; C12.1@2695,1295.68 C12.1@2693.03,1295.68 ; U5.14@2767.2,1937.93 2768.83,1936.31 2826.38,1936.31 C21.1@2828,1934.68 2876.77,1934.68 DS1.1@2878.46,1933 ; U10.5@2797.73,1298 2805.61,1298 2855,1347.39 2855,1377 2874,1396 2945.35,1396 2963.03,1378.31 Rio1.2@2965,1378.31 ; U11.4@2851.49,1108.2 U11.3@2757,1108.2 2713.14,1108.2 C15.2@2682.97,1138.37 ; 2862.84,1733.18 2862.84,1755.87 2864.6,1757.63 U6.5@2881.29,1757.63 2940.09,1757.63 2946.22,1751.5 3006.02,1751.5 3012.15,1757.63 U6.6@3042.71,1757.63
  Bottom Layer w8: v1(1580,1923.32) 1638,1865.32
  other v1: 1853,1197 2182,1224 1859,1509
  other v2: 2851,1340 2160,1829
VReg: C13.2 U9.3 U11.5 U11.6 | length 316.3
  Top Layer w8: U9.3@2627.38,1187.92 2634.62,1195.16 2712.16,1195.16 2721.74,1204.74 2749.26,1204.74 2756,1211.47 2774.81,1211.47 2800.69,1237.35 C13.2@2800.69,1239.31 2805,1235 2805,1219.65 2841.65,1183 U11.6@2851.49,1183 U11.5@2851.49,1145.6
pads on no net: L1.7 L1.8 U3.7 U3.8 U3.28 U3.31 U3.32 U3.33 U5.11 U8.3 U8.5 U8.6 U8.7 U8.8 U8.9 U8.10 U8.11 U8.12 U8.13 U8.18 U8.21 U8.22 U8.23 U8.25 U8.27 U8.28 U8.29 U8.31 U8.32 U10.3 U10.4
copper on no net:
  other v1: 2492.84,1520.29 2536.15,1520.29 2492.84,1563.6 2536.15,1563.6

## Polygon pours and split planes (outlines as drawn)
GND on Top Layer "GND Plan" (solid, shelved, pour order 0): 1441,1982 1443,1984 4197,1984 4197,1077 4196,1078 1441,1078
GND on Bottom Layer "GND Plan" (solid, shelved, pour order 1): 1441,1986 1445,1986 4198,1986 4198,1074 4197,1075 1441,1075 1441,1984
GND on Int1 (GND) (split plane): 600,1979.9 3278.9,1979.9 3278.9,1090.1 600,1090.1 599.29,1090.03 588.23,1090.39 576.51,1091.54 564.88,1093.46 553.41,1096.14 542.14,1099.56 531.12,1103.7 520.39,1108.57 510,1114.12 500,1120.34 490.43,1127.2 481.32,1134.67 472.72,1142.72 464.67,1151.32 457.2,1160.43 450.34,1170 444.12,1180 438.57,1190.39 433.7,1201.12 429.56,1212.14 426.14,1223.41 423.46,1234.88 421.54,1246.51 420.39,1258.23 420.03,1269.29 420.1,1270 420.1,1800 420.03,1800.71 420.39,1811.77 421.54,1823.49 423.46,1835.12 426.14,1846.59 429.56,1857.86 433.7,1868.88 438.57,1879.61 444.12,1890 450.34,1900 457.2,1909.57 464.67,1918.68 472.72,1927.28 481.32,1935.33 490.43,1942.8 500,1949.66 510,1955.88 520.39,1961.43 531.12,1966.3 542.14,1970.44 553.41,1973.86 564.88,1976.54 576.51,1978.46 588.23,1979.61 599.29,1979.97
VCC on Int2 (PWR) (split plane): 600,1979.9 3278.9,1979.9 3278.9,1090.1 600,1090.1 599.29,1090.03 588.23,1090.39 576.51,1091.54 564.88,1093.46 553.41,1096.14 542.14,1099.56 531.12,1103.7 520.39,1108.57 510,1114.12 500,1120.34 490.43,1127.2 481.32,1134.67 472.72,1142.72 464.67,1151.32 457.2,1160.43 450.34,1170 444.12,1180 438.57,1190.39 433.7,1201.12 429.56,1212.14 426.14,1223.41 423.46,1234.88 421.54,1246.51 420.39,1258.23 420.03,1269.29 420.1,1270 420.1,1800 420.03,1800.71 420.39,1811.77 421.54,1823.49 423.46,1835.12 426.14,1846.59 429.56,1857.86 433.7,1868.88 438.57,1879.61 444.12,1890 450.34,1900 457.2,1909.57 464.67,1918.68 472.72,1927.28 481.32,1935.33 490.43,1942.8 500,1949.66 510,1955.88 520.39,1961.43 531.12,1966.3 542.14,1970.44 553.41,1973.86 564.88,1976.54 576.51,1978.46 588.23,1979.61 599.29,1979.97

## Silkscreen, mask and mechanical layers (free items; w line width, h text height)
Top Overlay:
  text "Aura / RX v1.0" at 3152.64,1905.63 h18
Mechanical 1:
  the board outline again, w10